# EAGLE board CT_schematic (EAGLE 7.6.0)

Size 100 x 80 mm. Coordinates in mm from the lower left corner, seen from the top.
Outline: 0,0 100,0 100,80 0,80 0,0
Copper layers (1*16): Top 0.035mm / dielectric 1.5mm / Bottom 0.035mm
Design rules "default": minimum track width 10mil, minimum drill 24mil, track to track 8mil, track to pad 8mil, pad to pad 8mil, via to via 8mil, smd to smd 8mil, copper to edge 40mil, drill to drill 8mil, minimum pad ring 10mil, minimum via ring 8mil, stop-mask expansion 4mil, vias tented up to drill 0mil, thermal gap 10mil

## Footprints (pad centres in the part's own frame; a part is rotated, then mirrored left to right if it is on the bottom)
C0603 = smd 0.8 x 0.8: 1 -0.762,0; 2 0.762,0
C0402 = smd 0.5 x 0.5: 1 -0.508,0; 2 0.508,0
C1206 = smd 1.3 x 1.6: 1 -1.524,0; 2 1.524,0
C0805 = smd 1.2 x 1.3: 1 -1.016,0; 2 1.016,0
C1210 = smd 1.2 x 2.5: 1 -1.524,0; 2 1.524,0
2220 = smd 1.85 x 5.5: 1 -2.55,0; 2 2.55,0
R0603 = smd 0.8 x 0.8: 1 -0.762,0; 2 0.762,0
EXV-9H = smd 3.505 x 1.676: 1 -2.857,0; 2 2.857,0
L0603 = smd 0.8 x 0.8: 1 -0.762,0; 2 0.762,0
DR1040 = smd 1.6 x 3.2: 1 -4.458,0; 2 4.458,0
PJ-037B_PACKAGE = drill 3.7 square: 1 12,0 | drill 3.2 square: 2 6,0
LQFP176 = smd 0.3 x 1.2: 1 -10.75,-12.75; 2 -10.25,-12.75; 3 -9.75,-12.75; 4 -9.25,-12.75; 5 -8.75,-12.75; 6 -8.25,-12.75; 7 -7.75,-12.75; 8 -7.25,-12.75; 9 -6.75,-12.75; 10 -6.25,-12.75; 11 -5.75,-12.75; 12 -5.25,-12.75; 13 -4.75,-12.75; 14 -4.25,-12.75; 15 -3.75,-12.75; 16 -3.25,-12.75; 17 -2.75,-12.75; 18 -2.25,-12.75; 19 -1.75,-12.75; 20 -1.25,-12.75; 21 -0.75,-12.75; 22 -0.25,-12.75; 23 0.25,-12.75; 24 0.75,-12.75; 25 1.25,-12.75; 26 1.75,-12.75; 27 2.25,-12.75; 28 2.75,-12.75; 29 3.25,-12.75; 30 3.75,-12.75; 31 4.25,-12.75; 32 4.75,-12.75; 33 5.25,-12.75; 34 5.75,-12.75; 35 6.25,-12.75; 36 6.75,-12.75; 37 7.25,-12.75; 38 7.75,-12.75; 39 8.25,-12.75; 40 8.75,-12.75; 41 9.25,-12.75; 42 9.75,-12.75; 43 10.25,-12.75; 44 10.75,-12.75; 89 10.75,12.75; 90 10.25,12.75; 91 9.75,12.75; 92 9.25,12.75; 93 8.75,12.75; 94 8.25,12.75; 95 7.75,12.75; 96 7.25,12.75; 97 6.75,12.75; 98 6.25,12.75; 99 5.75,12.75; 100 5.25,12.75; 101 4.75,12.75; 102 4.25,12.75; 103 3.75,12.75; 104 3.25,12.75; 105 2.75,12.75; 106 2.25,12.75; 107 1.75,12.75; 108 1.25,12.75; 109 0.75,12.75; 110 0.25,12.75; 111 -0.25,12.75; 112 -0.75,12.75; 113 -1.25,12.75; 114 -1.75,12.75; 115 -2.25,12.75; 116 -2.75,12.75; 117 -3.25,12.75; 118 -3.75,12.75; 119 -4.25,12.75; 120 -4.75,12.75; 121 -5.25,12.75; 122 -5.75,12.75; 123 -6.25,12.75; 124 -6.75,12.75; 125 -7.25,12.75; 126 -7.75,12.75; 127 -8.25,12.75; 128 -8.75,12.75; 129 -9.25,12.75; 130 -9.75,12.75; 131 -10.25,12.75; 132 -10.75,12.75 | smd 1.2 x 0.3: 45 12.75,-10.75; 46 12.75,-10.25; 47 12.75,-9.75; 48 12.75,-9.25; 49 12.75,-8.75; 50 12.75,-8.25; 51 12.75,-7.75; 52 12.75,-7.25; 53 12.75,-6.75; 54 12.75,-6.25; 55 12.75,-5.75; 56 12.75,-5.25; 57 12.75,-4.75; 58 12.75,-4.25; 59 12.75,-3.75; 60 12.75,-3.25; 61 12.75,-2.75; 62 12.75,-2.25; 63 12.75,-1.75; 64 12.75,-1.25; 65 12.75,-0.75; 66 12.75,-0.25; 67 12.75,0.25; 68 12.75,0.75; 69 12.75,1.25; 70 12.75,1.75; 71 12.75,2.25; 72 12.75,2.75; 73 12.75,3.25; 74 12.75,3.75; 75 12.75,4.25; 76 12.75,4.75; 77 12.75,5.25; 78 12.75,5.75; 79 12.75,6.25; 80 12.75,6.75; 81 12.75,7.25; 82 12.75,7.75; 83 12.75,8.25; 84 12.75,8.75; 85 12.75,9.25; 86 12.75,9.75; 87 12.75,10.25; 88 12.75,10.75; 133 -12.75,10.75; 134 -12.75,10.25; 135 -12.75,9.75; 136 -12.75,9.25; 137 -12.75,8.75; 138 -12.75,8.25; 139 -12.75,7.75; 140 -12.75,7.25; 141 -12.75,6.75; 142 -12.75,6.25; 143 -12.75,5.75; 144 -12.75,5.25; 145 -12.75,4.75; 146 -12.75,4.25; 147 -12.75,3.75; 148 -12.75,3.25; 149 -12.75,2.75; 150 -12.75,2.25; 151 -12.75,1.75; 152 -12.75,1.25; 153 -12.75,0.75; 154 -12.75,0.25; 155 -12.75,-0.25; 156 -12.75,-0.75; 157 -12.75,-1.25; 158 -12.75,-1.75; 159 -12.75,-2.25; 160 -12.75,-2.75; 161 -12.75,-3.25; 162 -12.75,-3.75; 163 -12.75,-4.25; 164 -12.75,-4.75; 165 -12.75,-5.25; 166 -12.75,-5.75; 167 -12.75,-6.25; 168 -12.75,-6.75; 169 -12.75,-7.25; 170 -12.75,-7.75; 171 -12.75,-8.25; 172 -12.75,-8.75; 173 -12.75,-9.25; 174 -12.75,-9.75; 175 -12.75,-10.25; 176 -12.75,-10.75
SOT-23-6 = smd 1.1 x 0.6: 1 -1.4,0.95; 2 -1.4,0; 3 -1.4,-0.95; 4 1.4,-0.95; 5 1.4,0; 6 1.4,0.95
ARDUCAM = drill 1 pad 1.8 square: 1 0,0 | drill 1 pad 1.8: 2 0,2.54; 3 2.54,0; 4 2.54,2.54; 5 5.08,0; 6 5.08,2.54; 7 7.62,0; 8 7.62,2.54; 9 10.16,0; 10 10.16,2.54; 11 12.7,0; 12 12.7,2.54; 13 15.24,0; 14 15.24,2.54; 15 17.78,0; 16 17.78,2.54; 17 20.32,0; 18 20.32,2.54; 19 22.86,0; 20 22.86,2.54
IS61WV102416BLL-10MLI = smd 0.4 x 0.4: A1 0,0; A2 0.75,0; A3 1.5,0; A4 2.25,0; A5 3,0; A6 3.75,0; B1 0,-0.75; B2 0.75,-0.75; B3 1.5,-0.75; B4 2.25,-0.75; B5 3,-0.75; B6 3.75,-0.75; C1 0,-1.5; C2 0.75,-1.5; C3 1.5,-1.5; C4 2.25,-1.5; C5 3,-1.5; C6 3.75,-1.5; D1 0,-2.25; D2 0.75,-2.25; D3 1.5,-2.25; D4 2.25,-2.25; D5 3,-2.25; D6 3.75,-2.25; E1 0,-3; E2 0.75,-3; E3 1.5,-3; E4 2.25,-3; E5 3,-3; E6 3.75,-3; F1 0,-3.75; F2 0.75,-3.75; F3 1.5,-3.75; F4 2.25,-3.75; F5 3,-3.75; F6 3.75,-3.75; G1 0,-4.5; G2 0.75,-4.5; G3 1.5,-4.5; G4 2.25,-4.5; G5 3,-4.5; G6 3.75,-4.5; H1 0,-5.25; H2 0.75,-5.25; H3 1.5,-5.25; H4 2.25,-5.25; H5 3,-5.25; H6 3.75,-5.25
SOIC-8 = smd 1.6 x 0.6: 1 -2.7,1.905 | smd 1.55 x 0.6: 2 -2.7,0.635; 3 -2.7,-0.635; 4 -2.7,-1.905; 5 2.7,-1.905; 6 2.7,-0.635; 7 2.7,0.635; 8 2.7,1.905
MICRO_USB_AB = smd 0.4 x 1.35: 1 1.3,0.26; 2 0.65,0.26; 3 0,0.26; 4 -0.65,0.26; 5 -1.3,0.26 | drill 0.6 pad 0.95 long: 6 4.175,-2.54; 7 -4.175,-2.54 | drill 0.7 pad 1.1 long: 8 -2.225,0.46; 9 2.225,0.46
SOT143B = smd 1 x 0.7: 1 -0.75,-1 | smd 0.6 x 0.7: 2 0.95,-1; 3 0.95,1; 4 -0.95,1
ASEK = smd 1.4 x 1: 1 -1.1,-0.8; 2 1.1,-0.8; 3 1.1,0.8; 4 -1.1,0.8
ASFL1 = smd 1.7 x 1.5: 1 -1.27,-1.1; 2 1.27,-1.1; 3 1.27,1.1; 4 -1.27,1.1
IDT74FCT38072 = smd 0.51 x 1: 1 0,0; 2 1.27,0; 3 2.54,0; 4 3.81,0; 5 3.81,4.95; 6 2.54,4.95; 7 1.27,4.95; 8 0,4.95
WSON-8 = smd 0.3 x 0.6: 1 -0.75,0; 2 0.05,0; 3 0.85,0; 4 1.65,0; 5 1.65,3.8; 6 0.85,3.8; 7 0.05,3.8; 8 -0.75,3.8 | smd 3 x 2.6: PAD 0.45,1.9
HTSSOP14 = smd 1.676 x 0.356: 1 -2.8,1.95; 2 -2.8,1.3; 3 -2.8,0.65; 4 -2.8,0; 5 -2.8,-0.65; 6 -2.8,-1.3; 7 -2.8,-1.95; 8 2.8,-1.95; 9 2.8,-1.3; 10 2.8,-0.65; 11 2.8,0; 12 2.8,0.65; 13 2.8,1.3; 14 2.8,1.95 | smd 3 x 5: 15 0,0 | drill 0.4 pad 0.45: P$1 -0.75,1.5; P$2 0.75,1.5; P$3 -0.75,0; P$4 0.8,0; P$5 -0.75,-1.5; P$6 0.9,-1.5
QFN-16_EP = smd 0.805 x 0.3: 1 -1.452,0.75; 2 -1.452,0.25; 3 -1.452,-0.25; 4 -1.452,-0.75; 9 1.452,-0.75; 10 1.452,-0.25; 11 1.452,0.25; 12 1.452,0.75 | smd 0.3 x 0.805: 5 -0.75,-1.452; 6 -0.25,-1.452; 7 0.25,-1.452; 8 0.75,-1.452; 13 0.75,1.452; 14 0.25,1.452; 15 -0.25,1.452; 16 -0.75,1.452 | smd 1.55 x 1.55: 17 0,0
QFN-38_UHF = smd 0.75 x 0.3: 1 -2.4,2.75; 2 -2.4,2.25; 3 -2.4,1.75; 4 -2.4,1.25; 6 -2.4,0.25; 7 -2.4,-0.25; 8 -2.4,-0.75; 9 -2.4,-1.25; 10 -2.4,-1.75; 11 -2.4,-2.25; 12 -2.4,-2.75; 20 2.4,-2.75; 21 2.4,-2.25; 22 2.4,-1.75; 23 2.4,-1.25; 24 2.4,-0.75; 25 2.4,-0.25; 26 2.4,0.25; 27 2.4,0.75; 28 2.4,1.25; 29 2.4,1.75; 30 2.4,2.25; 31 2.4,2.75 | smd 0.758 x 0.3: 5 -2.4,0.75 | smd 0.3 x 0.75: 13 -1.5,-3.4; 14 -1,-3.4; 15 -0.5,-3.4; 16 0,-3.4; 17 0.5,-3.4; 18 1,-3.4; 19 1.5,-3.4; 32 1.5,3.4; 33 1,3.4; 34 0.5,3.4; 35 0,3.4; 36 -0.5,3.4; 37 -1,3.4; 38 -1.5,3.4 | smd 3.2 x 5.2: 39 0,0
IRF8306MTRPBF = smd 0.9 x 1.85: 1 0,0; 2 0,-2.35; 6 6.4,0; 7 6.4,-2.35 | smd 0.75 x 0.75: 3 1.75,-1.175 | smd 1.45 x 0.87: 4 3.5,-0.565; 5 3.5,-1.785
SW_4-1437565-2 = smd 1.4 x 2.1: 1 -2.23,4.55; 2 -2.23,-4.55; 3 2.23,4.55; 4 2.23,-4.55
LGM67K-G1J2-24-Z = smd 0.8 x 1.4: A -2,0; C 0,0
NC7SZ125M5X = smd 1.3 x 0.7: 1 -1.3,0.95; 2 -1.3,0; 3 -1.3,-0.95; 4 1.3,-0.95; 5 1.3,0.95

## Placement (x,y rotation side)
C1  1e-06  [C0603]  -26.67,86.36 0 top  (outside the outline)
C2  1e-07  [C0603]  -30.48,86.36 0 top  (outside the outline)
C3  1e-07  [C0603]  -34.29,86.36 0 top  (outside the outline)
C4  1e-07  [C0603]  -38.1,86.36 0 top  (outside the outline)
C5  1e-07  [C0603]  -41.91,86.36 0 top  (outside the outline)
C6  1e-07  [C0603]  -45.72,86.36 0 top  (outside the outline)
C7  1e-07  [C0603]  -49.53,86.36 0 top  (outside the outline)
C8  1e-07  [C0603]  -53.34,86.36 0 top  (outside the outline)
C9  1e-07  [C0603]  -57.15,86.36 0 top  (outside the outline)
C10  1e-07  [C0603]  -60.96,86.36 0 top  (outside the outline)
C11  1e-07  [C0603]  -64.77,86.36 0 top  (outside the outline)
C12  1e-07  [C0603]  -68.58,86.36 0 top  (outside the outline)
C13  1e-07  [C0603]  -72.39,86.36 0 top  (outside the outline)
C14  1e-07  [C0603]  -76.2,86.36 0 top  (outside the outline)
C15  1e-07  [C0603]  -80.01,86.36 0 top  (outside the outline)
C16  1e-07  [C0603]  -83.82,86.36 0 top  (outside the outline)
C17  1e-07  [C0603]  -15.24,91.44 0 top  (outside the outline)
C18  4.7e-06  [C0603]  -15.24,86.36 0 top  (outside the outline)
C19  1e-08  [C0603]  -19.05,91.44 0 top  (outside the outline)
C20  1e-06  [C0603]  -22.86,91.44 0 top  (outside the outline)
C21  1e-07  [C0402]  -80.01,91.44 0 top  (outside the outline)
C22  1e-07  [C0402]  -83.82,91.44 0 top  (outside the outline)
C23  1e-06  [C0603]  -26.67,91.44 0 top  (outside the outline)
C24  1e-07  [C0402]  -87.63,91.44 0 top  (outside the outline)
C25  2.2e-06  [C0603]  -19.05,86.36 0 top  (outside the outline)
C26  1e-08  [C0402]  -15.24,96.52 0 top  (outside the outline)
C27  1e-08  [C0402]  -19.05,96.52 0 top  (outside the outline)
C28  1e-08  [C0402]  -22.86,96.52 0 top  (outside the outline)
C29  1e-08  [C0402]  -26.67,96.52 0 top  (outside the outline)
C30  1e-08  [C0402]  -30.48,96.52 0 top  (outside the outline)
C31  1e-05  [C1206]  -16.51,69.85 0 top  (outside the outline)
C32  1e-05  [C0805]  -45.72,69.85 0 top  (outside the outline)
C33  1e-06  [C0603]  -30.48,91.44 0 top  (outside the outline)
C34  3.3e-09  [C0402]  -76.2,91.44 0 top  (outside the outline)
C35  1e-07  [C0402]  -34.29,96.52 0 top  (outside the outline)
C36  2.2e-05  [C1210]  -78.74,62.23 0 top  (outside the outline)
C37  2.2e-05  [C1210]  -85.09,62.23 0 top  (outside the outline)
C38  1e-05  [C0805]  -50.8,69.85 0 top  (outside the outline)
C39  1e-05  [C0805]  -55.88,69.85 0 top  (outside the outline)
C40  1e-05  [C0805]  -60.96,69.85 0 top  (outside the outline)
C41  1e-06  [C0603]  -34.29,91.44 0 top  (outside the outline)
C42  1e-07  [C0402]  -38.1,96.52 0 top  (outside the outline)
C43  6.8e-05  [2220]  -31.75,44.45 0 top  (outside the outline)
C44  1e-08  [C0402]  -41.91,96.52 0 top  (outside the outline)
C45  1e-05  [C1206]  -22.86,69.85 0 top  (outside the outline)
C46  1e-05  [C0805]  -66.04,69.85 0 top  (outside the outline)
C47  1e-07  [C0402]  -45.72,96.52 0 top  (outside the outline)
C48  2.2e-06  [C0603]  -22.86,86.36 0 top  (outside the outline)
C49  2.45e-08  [R0603]  -41.91,76.2 0 top  (outside the outline)
C50  2.8258362168397e-09  [R0603]  -76.2,69.85 0 top  (outside the outline)
C51  7.105e-09  [R0603]  -16.51,76.2 0 top  (outside the outline)
C52  0.0001  [EXV-9H]  -82.55,53.34 0 top  (outside the outline)
C53  0.0001  [EXV-9H]  -17.78,63.5 0 top  (outside the outline)
C54  1e-08  [C0402]  -49.53,96.52 0 top  (outside the outline)
C55  1e-08  [C0402]  -53.34,96.52 0 top  (outside the outline)
F1  240.0  [L0603]  -38.1,91.44 0 top  (outside the outline)
I1  5.2e-06  [DR1040]  -29.21,33.02 0 top  (outside the outline)
I2  5.2e-06  [DR1040]  -40.64,33.02 0 top  (outside the outline)
J1  PJ-037B  [PJ-037B_PACKAGE]  -54.61,7.62 0 top  (outside the outline)
R2  1000.0  [R0603]  -41.91,91.44 0 top  (outside the outline)
R7  4700.0  [R0603]  -45.72,91.44 0 top  (outside the outline)
R8  4700.0  [R0603]  -49.53,91.44 0 top  (outside the outline)
R13  47000.0  [R0603]  -46.99,76.2 0 top  (outside the outline)
R14  10000.0  [R0603]  -52.07,76.2 0 top  (outside the outline)
R15  10000.0  [R0603]  -57.15,76.2 0 top  (outside the outline)
R16  10000.0  [R0603]  -62.23,76.2 0 top  (outside the outline)
R17  10000.0  [R0603]  -67.31,76.2 0 top  (outside the outline)
R18  10000.0  [R0603]  -72.39,76.2 0 top  (outside the outline)
R19  10000.0  [R0603]  -77.47,76.2 0 top  (outside the outline)
R20  10000.0  [R0603]  -82.55,76.2 0 top  (outside the outline)
R21  10000.0  [R0603]  -15.24,81.28 0 top  (outside the outline)
R22  10000.0  [R0603]  -20.32,81.28 0 top  (outside the outline)
R23  10000.0  [R0603]  -25.4,81.28 0 top  (outside the outline)
R24  100000.0  [R0603]  -21.59,76.2 0 top  (outside the outline)
R25  200.0  [R0603]  -53.34,91.44 0 top  (outside the outline)
R26  1000.0  [R0603]  -57.15,91.44 0 top  (outside the outline)
R27  71007.101651032  [R0603]  -83.82,69.85 0 top  (outside the outline)
R28  22000.0  [R0603]  -30.48,81.28 0 top  (outside the outline)
R29  20000.0  [R0603]  -35.56,81.28 0 top  (outside the outline)
R30  150000.0  [R0603]  -26.67,76.2 0 top  (outside the outline)
R31  300000.0  [R0603]  -31.75,76.2 0 top  (outside the outline)
R32  100000.0  [R0603]  -36.83,76.2 0 top  (outside the outline)
R33  200.0  [R0603]  -60.96,91.44 0 top  (outside the outline)
R34  1000.0  [R0603]  -64.77,91.44 0 top  (outside the outline)
R35  10000.0  [R0603]  -40.64,81.28 0 top  (outside the outline)
R36  75000.0  [R0603]  -45.72,81.28 0 top  (outside the outline)
R37  10000.0  [R0603]  -50.8,81.28 0 top  (outside the outline)
R38  10000.0  [R0603]  -55.88,81.28 0 top  (outside the outline)
R39  95300.0  [R0603]  -60.96,81.28 0 top  (outside the outline)
R40  95300.0  [R0603]  -66.04,81.28 0 top  (outside the outline)
R41  10000.0  [R0603]  -71.12,81.28 0 top  (outside the outline)
R42  10000.0  [R0603]  -76.2,81.28 0 top  (outside the outline)
R43  10000.0  [R0603]  -81.28,81.28 0 top  (outside the outline)
R44  48900.0  [R0603]  -86.36,81.28 0 top  (outside the outline)
U1  STM32F439IIT6  [LQFP176]  -26.67,13.97 0 top  (outside the outline)
U2  MAX4995AAUT+T  [SOT-23-6]  -27.94,69.85 0 top  (outside the outline)
U3  arducam_ov2640  [ARDUCAM]  -50.8,60.96 0 top  (outside the outline)
U4  IS61WV102416BLL-10MLI  [IS61WV102416BLL-10MLI]  -20.32,36.83 0 top  (outside the outline)
U5  M24M02-DRMN6TP  [SOIC-8]  -58.42,33.02 0 top  (outside the outline)
U6  47590-0001  [MICRO_USB_AB]  -63.5,7.62 0 top  (outside the outline)
U7  prtr5v0u2ax  [SOT143B]  -66.04,96.52 0 top  (outside the outline)
U8  ASEK-32.768KHz-ECST  [ASEK]  -73.66,53.34 0 top  (outside the outline)
U9  ASFL1-25MHZ-NCS  [ASFL1]  -26.67,54.61 0 top  (outside the outline)
U10  idt74fct38072  [IDT74FCT38072]  -55.88,50.8 0 top  (outside the outline)
U11  LP3878SDX-ADJ/NOPB  [WSON-8]  -53.34,43.18 0 top  (outside the outline)
U12  tps54225PWP  [HTSSOP14]  -58.42,62.23 0 top  (outside the outline)
U13  LTC3601EUD#PBF  [QFN-16_EP]  -69.85,91.44 0 top  (outside the outline)
U14  LP3878SDX-ADJ/NOPB  [WSON-8]  -73.66,43.18 0 top  (outside the outline)
U15  LTC2928CUHF#PBF  [QFN-38_UHF]  -34.29,53.34 0 top  (outside the outline)
U16  IRF8306MTRPbF  [IRF8306MTRPBF]  -76.2,34.29 0 top  (outside the outline)
U17  IRF8306MTRPbF  [IRF8306MTRPBF]  -26.67,45.72 0 top  (outside the outline)
U18  4-1437565-2  [SW_4-1437565-2]  -83.82,6.35 0 top  (outside the outline)
U19  Q65110A2395  [LGM67K-G1J2-24-Z]  -67.31,62.23 0 top  (outside the outline)
U20  nc7sz125m5x  [NC7SZ125M5X]  -33.02,69.85 0 top  (outside the outline)
U21  nc7sz125m5x  [NC7SZ125M5X]  -39.37,69.85 0 top  (outside the outline)

## Library data of the parts
C1-C55 F1 I1 I2 J1 R2 R7 R8 R13-R44 U1-U21 = circuit_tree

## Nets
CLK_U1_9: U1.9 U8.3
CLK_U1_29: U1.29 U10.6
CLK_U3_8: U3.8 U10.7
CLK_U10_3: U9.3 U10.3
GND: C1.2 C2.2 C3.2 C4.2 C5.2 C6.2 C7.2 C8.2 C9.2 C10.2 C11.2 C12.2 C13.2 C14.2 C15.2 C16.2 C17.2 C18.2 C19.2 C20.2 C21.2 C22.2 C23.2 C24.2 C25.2 C26.2 C27.2 C28.2 C29.2 C30.2 C31.2 C32.2 C33.2 C34.2 C36.2 C37.2 C38.2 C39.2 C40.2 C41.2 C43.1 C43.2 C44.2 C45.2 C46.2 C47.2 C48.2 C49.2 C50.2 C51.2 C52.2 C53.2 C54.2 C55.2 J1.2 R2.2 R13.2 R19.2 R23.2 R26.2 R28.2 R29.2 R31.2 R34.2 R36.2 R39.2 R40.2 R41.2 R42.2 R43.2 U1.14 U1.22 U1.37 U1.61 U1.71 U1.90 U1.102 U1.113 U1.126 U1.135 U1.148 U1.158 U2.2 U3.2 U3.20 U4.D1 U4.E6 U5.4 U6.5 U6.6 U6.7 U6.8 U6.9 U7.1 U8.2 U9.2 U10.4 U10.5 U10.8 U11.3 U11.PAD U12.5 U12.8 U12.9 U12.15 U13.1 U13.9 U13.17 U14.3 U14.PAD U15.8 U15.9 U15.10 U15.12 U15.13 U15.24 U15.25 U15.30 U15.32 U15.39 U19.C U20.1 U20.3 U21.1 U21.3
NET_U1_31: R7.1 U1.31 U20.4
NET_U1_39: C19.1 C20.1 F1.1 U1.38 U1.39
NET_U1_48: R17.1 U1.48
NET_U1_58: R16.1 U1.58
NET_U1_125: C22.1 U1.125
NET_U1_164: U5.6
NET_U1_165: U5.5
NET_U1_166: R15.1 U1.166
NET_U1_171: R14.1 U1.171
NET_U1_175: U19.A
NET_U1_176: U18.3 U18.4
NET_U2_3: R13.1 U2.3
NET_U3_19: R8.1 U3.19 U21.4
NET_U4_A2: R21.1 U4.A2
NET_U4_B5: R20.1 U4.B5
NET_U4_G5: R22.1 U4.G5
NET_U5_3: R23.1 U5.3
NET_U11_1: C30.1 U11.1
NET_U11_6: R25.2 R26.1 U11.6
NET_U11_8: R24.1 U11.8
NET_U12_2: R27.2 R28.1 U12.2
NET_U12_3: C33.1 U12.3
NET_U12_4: C34.1 U12.4
NET_U12_10: C35.1 I1.1 U12.10 U12.11
NET_U12_12: C35.2 U12.12
NET_U13_3: C42.2 I2.1 U13.3 U13.4
NET_U13_6: C42.1 U13.6
NET_U13_7: C41.1 U13.7 U13.12
NET_U13_10: R31.1 U13.10
NET_U13_11: R29.1 R30.1 U13.11
NET_U13_14: U13.14
NET_U13_ATNET_3: I2.2 R30.2
NET_U14_1: C44.1 U14.1
NET_U14_6: R33.2 R34.1 U14.6
NET_U14_8: R32.1 U14.8
NET_U15_3: R42.1 U15.3
NET_U15_6: R39.1 U15.6
NET_U15_7: R40.1 U15.7
NET_U15_16: R41.1 R44.1 U15.16
NET_U15_18: R38.1 U15.18
NET_U15_19: R37.1 U15.19 U15.20
NET_U15_21: R35.1 R36.1 U15.21 U20.2 U21.2
NET_U15_26: C50.1 U15.26
NET_U15_27: C49.1 U15.27
NET_U15_28: C51.1 U15.28
NET_U15_38: R43.1 U15.38
NET_U16_3: U15.2 U16.3
NET_U17_3: U15.37 U17.3
NET_U18_1: R2.1 U18.1 U18.2
PROC_DCMI_D0: U1.86 U3.18
PROC_DCMI_D1: U1.87 U3.17
PROC_DCMI_D2: U1.88 U3.16
PROC_DCMI_D3: U1.89 U3.15
PROC_DCMI_D4: U1.3 U3.14
PROC_DCMI_D5: U1.145 U3.13
PROC_DCMI_D6: U1.4 U3.12
PROC_DCMI_D7: U1.5 U3.11
PROC_DCMI_D8: U1.83 U3.10
PROC_DCMI_D9: U1.84 U3.9
PROC_DCMI_HSYNC: U1.50 U3.6
PROC_DCMI_PIXCK: U1.52 U3.7
PROC_DCMI_VSYNC: U1.152 U3.5
PROC_FMC_A0: U1.16 U4.A3
PROC_FMC_A1: U1.17 U4.A4
PROC_FMC_A2: U1.18 U4.A5
PROC_FMC_A3: U1.19 U4.B3
PROC_FMC_A4: U1.20 U4.B4
PROC_FMC_A5: U1.21 U4.C3
PROC_FMC_A6: U1.60 U4.C4
PROC_FMC_A7: U1.63 U4.D4
PROC_FMC_A8: U1.64 U4.H2
PROC_FMC_A9: U1.65 U4.H3
PROC_FMC_A10: U1.66 U4.H4
PROC_FMC_A11: U1.67 U4.H5
PROC_FMC_A12: U1.106 U4.G3
PROC_FMC_A13: U1.107 U4.G4
PROC_FMC_A14: U1.108 U4.F3
PROC_FMC_A15: U1.109 U4.F4
PROC_FMC_A16: U1.99 U4.E4
PROC_FMC_A17: U1.100 U4.D3
PROC_FMC_A18: U1.101 U4.H1
PROC_FMC_A19: U1.2 U4.G2
PROC_FMC_D0: U1.104 U4.B6
PROC_FMC_D1: U1.105 U4.C5
PROC_FMC_D2: U1.142 U4.C6
PROC_FMC_D3: U1.143 U4.D5
PROC_FMC_D4: U1.68 U4.E5
PROC_FMC_D5: U1.69 U4.F5
PROC_FMC_D6: U1.70 U4.F6
PROC_FMC_D7: U1.73 U4.G6
PROC_FMC_D8: U1.74 U4.B1
PROC_FMC_D9: U1.75 U4.C1
PROC_FMC_D10: U1.76 U4.C2
PROC_FMC_D11: U1.77 U4.D2
PROC_FMC_D12: U1.78 U4.E2
PROC_FMC_D13: U1.96 U4.F2
PROC_FMC_D14: U1.97 U4.F1
PROC_FMC_D15: U1.98 U4.G1
PROC_FMC_NBL0: U1.169 U4.A1
PROC_GPIO_TO_U1_USB_FAULT: R18.1 U1.7 U2.6
PROC_GPIO_TO_U1_VBUS_EN: R19.1 U1.1 U2.4
PROC_USB_OTG_FS_DM: U6.2 U7.3
PROC_USB_OTG_FS_DP: U6.3 U7.2
PROC_USB_OTG_FS_ID: U6.4
PROC_USB_OTG_FS_VBUS: U2.1 U6.1 U7.4
VCC_6V4: C47.1 C48.1 C52.1 C53.1 J1.1 R35.2 R37.2 R38.2 R44.2 U15.11 U15.22 U16.1 U16.2 U16.6 U16.7 U17.1 U17.2 U17.6 U17.7
VCC_S1_6V4: C31.1 C38.1 C39.1 C40.1 R24.2 U11.4 U12.7 U12.13 U12.14 U13.15 U13.16 U16.4 U16.5
VCC_S2_6V4: C45.1 R32.2 U14.4 U17.4 U17.5
VCC_TIER1_1V2: C21.1 C32.1 R25.1 U1.81 U11.5
VCC_TIER1_3V3: C1.1 C2.1 C3.1 C4.1 C5.1 C6.1 C7.1 C8.1 C9.1 C10.1 C11.1 C12.1 C13.1 C14.1 C15.1 C16.1 C17.1 C18.1 C23.1 C24.1 C25.1 C26.1 C27.1 C28.1 C29.1 C36.1 C37.1 C54.1 C55.1 F1.2 I1.2 R7.2 R8.2 R14.2 R15.2 R16.2 R17.2 R18.2 R20.2 R21.2 R22.2 R27.1 U1.6 U1.15 U1.23 U1.36 U1.49 U1.62 U1.72 U1.82 U1.91 U1.103 U1.114 U1.127 U1.136 U1.149 U1.159 U1.172 U3.1 U4.D6 U4.E1 U5.8 U8.4 U9.4 U10.1 U10.2 U12.1 U20.5 U21.5
VCC_TIER1_5V0: C43.2 I2.2 R30.2 U2.5 U13.8
VCC_TIER2_1V2: C46.1 R33.1 U14.5

## Tracks (layer width: path | path; a pad name or v marks a point on that pad's centre or on a via)
CLK_U1_9  (1 unrouted)
CLK_U1_29  (1 unrouted)
CLK_U3_8  (1 unrouted)
CLK_U10_3  (1 unrouted)
GND  (124 unrouted)
NET_U1_31  (2 unrouted)
NET_U1_39  (4 unrouted)
NET_U1_48  (1 unrouted)
NET_U1_58  (1 unrouted)
NET_U1_125  (1 unrouted)
NET_U1_166  (1 unrouted)
NET_U1_171  (1 unrouted)
NET_U1_176  (1 unrouted)
NET_U2_3  (1 unrouted)
NET_U3_19  (2 unrouted)
NET_U4_A2  (1 unrouted)
NET_U4_B5  (1 unrouted)
NET_U4_G5  (1 unrouted)
NET_U5_3  (1 unrouted)
NET_U11_1  (1 unrouted)
NET_U11_6  (2 unrouted)
NET_U11_8  (1 unrouted)
NET_U12_2  (2 unrouted)
NET_U12_3  (1 unrouted)
NET_U12_4  (1 unrouted)
NET_U12_10  (3 unrouted)
NET_U12_12  (1 unrouted)
NET_U13_3  (3 unrouted)
NET_U13_6  (1 unrouted)
NET_U13_7  (2 unrouted)
NET_U13_10  (1 unrouted)
NET_U13_11  (2 unrouted)
NET_U13_ATNET_3  (1 unrouted)
NET_U14_1  (1 unrouted)
NET_U14_6  (2 unrouted)
NET_U14_8  (1 unrouted)
NET_U15_3  (1 unrouted)
NET_U15_6  (1 unrouted)
NET_U15_7  (1 unrouted)
NET_U15_16  (2 unrouted)
NET_U15_18  (1 unrouted)
NET_U15_19  (2 unrouted)
NET_U15_21  (4 unrouted)
NET_U15_26  (1 unrouted)
NET_U15_27  (1 unrouted)
NET_U15_28  (1 unrouted)
NET_U15_38  (1 unrouted)
NET_U16_3  (1 unrouted)
NET_U17_3  (1 unrouted)
NET_U18_1  (2 unrouted)
PROC_DCMI_D0  (1 unrouted)
PROC_DCMI_D1  (1 unrouted)
PROC_DCMI_D2  (1 unrouted)
PROC_DCMI_D3  (1 unrouted)
PROC_DCMI_D4  (1 unrouted)
PROC_DCMI_D5  (1 unrouted)
PROC_DCMI_D6  (1 unrouted)
PROC_DCMI_D7  (1 unrouted)
PROC_DCMI_D8  (1 unrouted)
PROC_DCMI_D9  (1 unrouted)
PROC_DCMI_HSYNC  (1 unrouted)
PROC_DCMI_PIXCK  (1 unrouted)
PROC_DCMI_VSYNC  (1 unrouted)
PROC_FMC_A0  (1 unrouted)
PROC_FMC_A1  (1 unrouted)
PROC_FMC_A2  (1 unrouted)
PROC_FMC_A3  (1 unrouted)
PROC_FMC_A4  (1 unrouted)
PROC_FMC_A5  (1 unrouted)
PROC_FMC_A6  (1 unrouted)
PROC_FMC_A7  (1 unrouted)
PROC_FMC_A8  (1 unrouted)
PROC_FMC_A9  (1 unrouted)
PROC_FMC_A10  (1 unrouted)
PROC_FMC_A11  (1 unrouted)
PROC_FMC_A12  (1 unrouted)
PROC_FMC_A13  (1 unrouted)
PROC_FMC_A14  (1 unrouted)
PROC_FMC_A15  (1 unrouted)
PROC_FMC_A16  (1 unrouted)
PROC_FMC_A17  (1 unrouted)
PROC_FMC_A18  (1 unrouted)
PROC_FMC_A19  (1 unrouted)
PROC_FMC_D0  (1 unrouted)
PROC_FMC_D1  (1 unrouted)
PROC_FMC_D2  (1 unrouted)
PROC_FMC_D3  (1 unrouted)
PROC_FMC_D4  (1 unrouted)
PROC_FMC_D5  (1 unrouted)
PROC_FMC_D6  (1 unrouted)
PROC_FMC_D7  (1 unrouted)
PROC_FMC_D8  (1 unrouted)
PROC_FMC_D9  (1 unrouted)
PROC_FMC_D10  (1 unrouted)
PROC_FMC_D11  (1 unrouted)
PROC_FMC_D12  (1 unrouted)
PROC_FMC_D13  (1 unrouted)
PROC_FMC_D14  (1 unrouted)
PROC_FMC_D15  (1 unrouted)
PROC_FMC_NBL0  (1 unrouted)
PROC_GPIO_TO_U1_USB_FAULT  (2 unrouted)
PROC_GPIO_TO_U1_VBUS_EN  (2 unrouted)
PROC_USB_OTG_FS_DM  (1 unrouted)
PROC_USB_OTG_FS_DP  (1 unrouted)
PROC_USB_OTG_FS_VBUS  (2 unrouted)
VCC_6V4  (18 unrouted)
VCC_S1_6V4  (12 unrouted)
VCC_S2_6V4  (4 unrouted)
VCC_TIER1_1V2  (4 unrouted)
VCC_TIER1_3V3  (68 unrouted)
VCC_TIER1_5V0  (4 unrouted)
VCC_TIER2_1V2  (2 unrouted)